# EAGLE board neopixel_square (EAGLE 8.6.1)
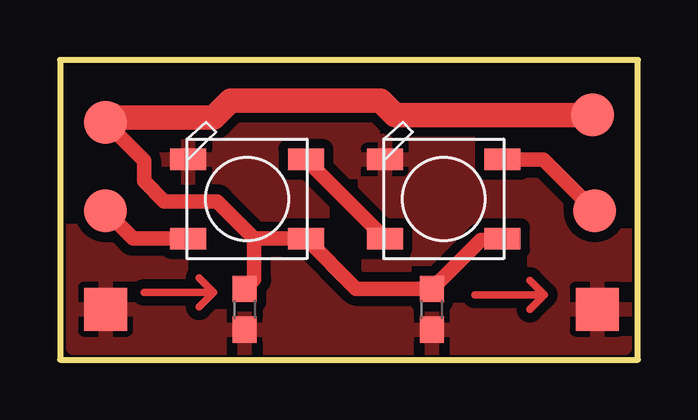
[diagram p0: board, top side]

Size 24.1 x 12.5 mm. Coordinates in mm from the lower left corner, seen from the top.
Outline: 0,0 24.1,0 24.1,12.5 0,12.5 0,0
Copper layers (1*16): Top 0.035mm / dielectric 1.5mm / Bottom 0.035mm
Design rules "OthermillDRC_1_64_v2": minimum track width 16mil, minimum drill 31mil, track to track 0.39878125mm, track to pad 0.39878125mm, pad to pad 0.39878125mm, via to via 0.39878125mm, smd to smd 0mil, copper to edge 0mil, drill to drill 1mil, minimum pad ring 0mil, minimum via ring 15mil, stop-mask expansion 1mil, vias tented up to drill 30mil, thermal gap 10mil

## Footprints (pad centres in the part's own frame; a part is rotated, then mirrored left to right if it is on the bottom)
C0603 = smd 1.1 x 1: 1 -0.85,0; 2 0.85,0
TP18R = smd 1.8 x 1.8: TP 0,0
TP18SQ = smd 1.8 x 1.8: TP 0,0
WS2812B = smd 1.5 x 0.9: 1-VDD 2.45,-1.65; 2-DOUT 2.45,1.65; 3-GND -2.45,1.65; 4-DIN -2.45,-1.65

## Placement (x,y rotation side)
C1  0.1uf  [C0603]  15.5,2.1 270 top
C9  0.1uf  [C0603]  7.7,2.1 270 top
DATA  TPTP18R  [TP18R]  1.9,6.2 0 top
DATA1  TPTP18R  [TP18R]  22.3,6.2 0 top
GND  TPTP18SQ  [TP18SQ]  1.9,2.1 0 top
GROUND  TPTP18R  [TP18R]  1.9,9.9 0 top
L1  WS2812B  [WS2812B]  16,6.7 0 top
L9  WS2812B  [WS2812B]  7.8,6.7 0 top
POWER  TPTP18SQ  [TP18SQ]  22.4,2.1 0 top
VCC  TPTP18R  [TP18R]  22.2,10.2 0 top

## Library data of the parts
C1 C9 = rcl; SPICEPREFIX: C
DATA DATA1 GND GROUND POWER VCC = testpad
L1 L9 = Duly_Drive-FINAL; SPICEPREFIX: E

## Nets
DATA_IN: DATA.TP L9.4-DIN
DATA_OUT: DATA1.TP L1.2-DOUT
GND: C1.2 C9.2 GND.TP L1.3-GND L9.3-GND POWER.TP
N$1: L1.4-DIN L9.2-DOUT
VCC: C1.1 C9.1 GROUND.TP L1.1-VDD L9.1-VDD VCC.TP

## Tracks (layer width: path | path; a pad name or v marks a point on that pad's centre or on a via)
DATA_IN
  Top 0.61: DATA.TP 3.05,5.05 L9.4-DIN
DATA_OUT
  Top 0.61: L1.2-DOUT 20.15,8.35 DATA1.TP
GND
  pour Top: 0.55,12 23.55,12 23.55,0.5 0.55,0.5
N$1
  Top 0.61: L9.2-DOUT L1.4-DIN
N$2
  Top 0.305: 17.3,2.7 20.2,2.7 19.6,3.3
N$3
  Top 0.305: 20.1,2.6 19.6,2.1
N$4
  Top 0.305: 3.5,2.8 6.4,2.8 5.8,3.4
N$5
  Top 0.305: 6.3,2.7 5.8,2.2
VCC
  Top 0.61: GROUND.TP 3.5,8.3 3.5,7.45 4.35,6.6 6.55,6.6 8.1,5.05 | 8.1,5.05 L9.1-VDD 12.35,2.95 C1.1 17.55,5 L1.1-VDD | C9.1 8.1,3.35 8.1,5.05
  Top 1.016: GROUND.TP 2.2,10.2 2.3,10.1 6.4,10.1 7.11,10.81 13.37,10.81 13.97,10.2 VCC.TP